# Altium PCB board_layout.PcbDoc
Units mm, origin at the board's own origin, x right, y up, seen from the top; angles counter-clockwise.
Board outline 300 x 220 mm, 4 copper layers (Top Layer, Internal Plane 1, Signal Layer 1, Bottom Layer), stack 1.6 mm thick; 35 components, 1 nets, 750 pads, 0 vias.
Unrouted connection lines stored in the file: 11.
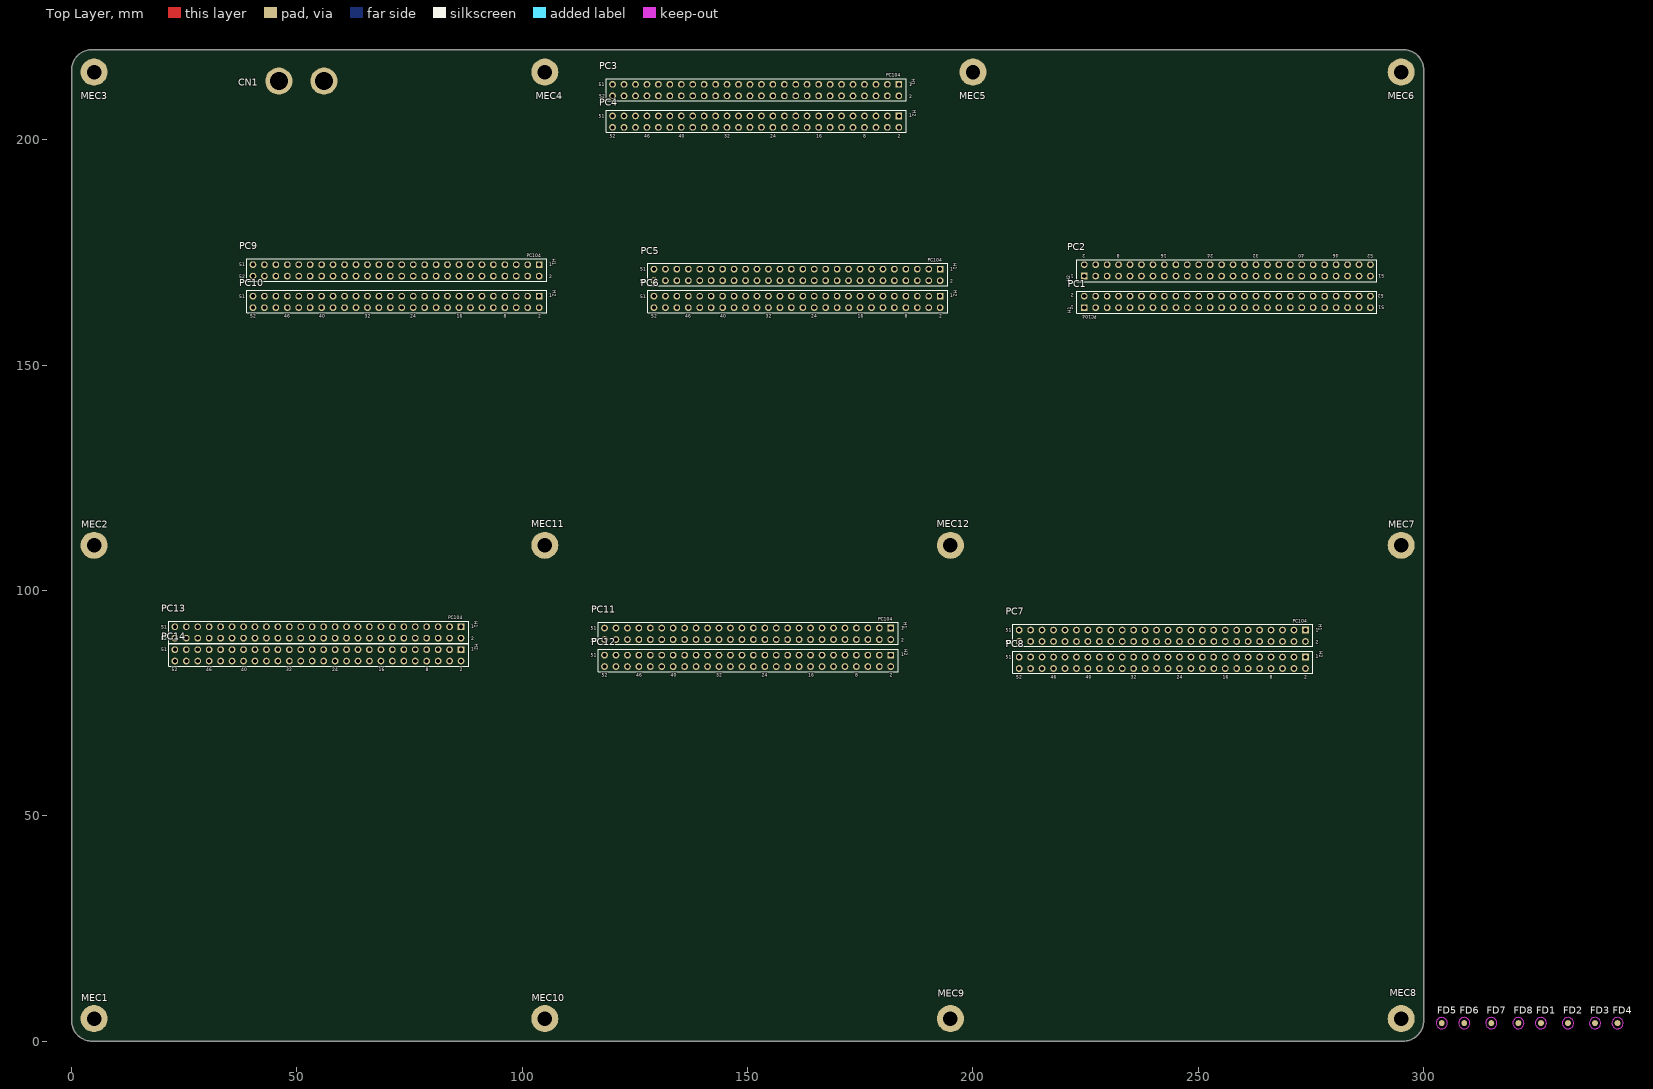
[diagram p0: Top Layer view]
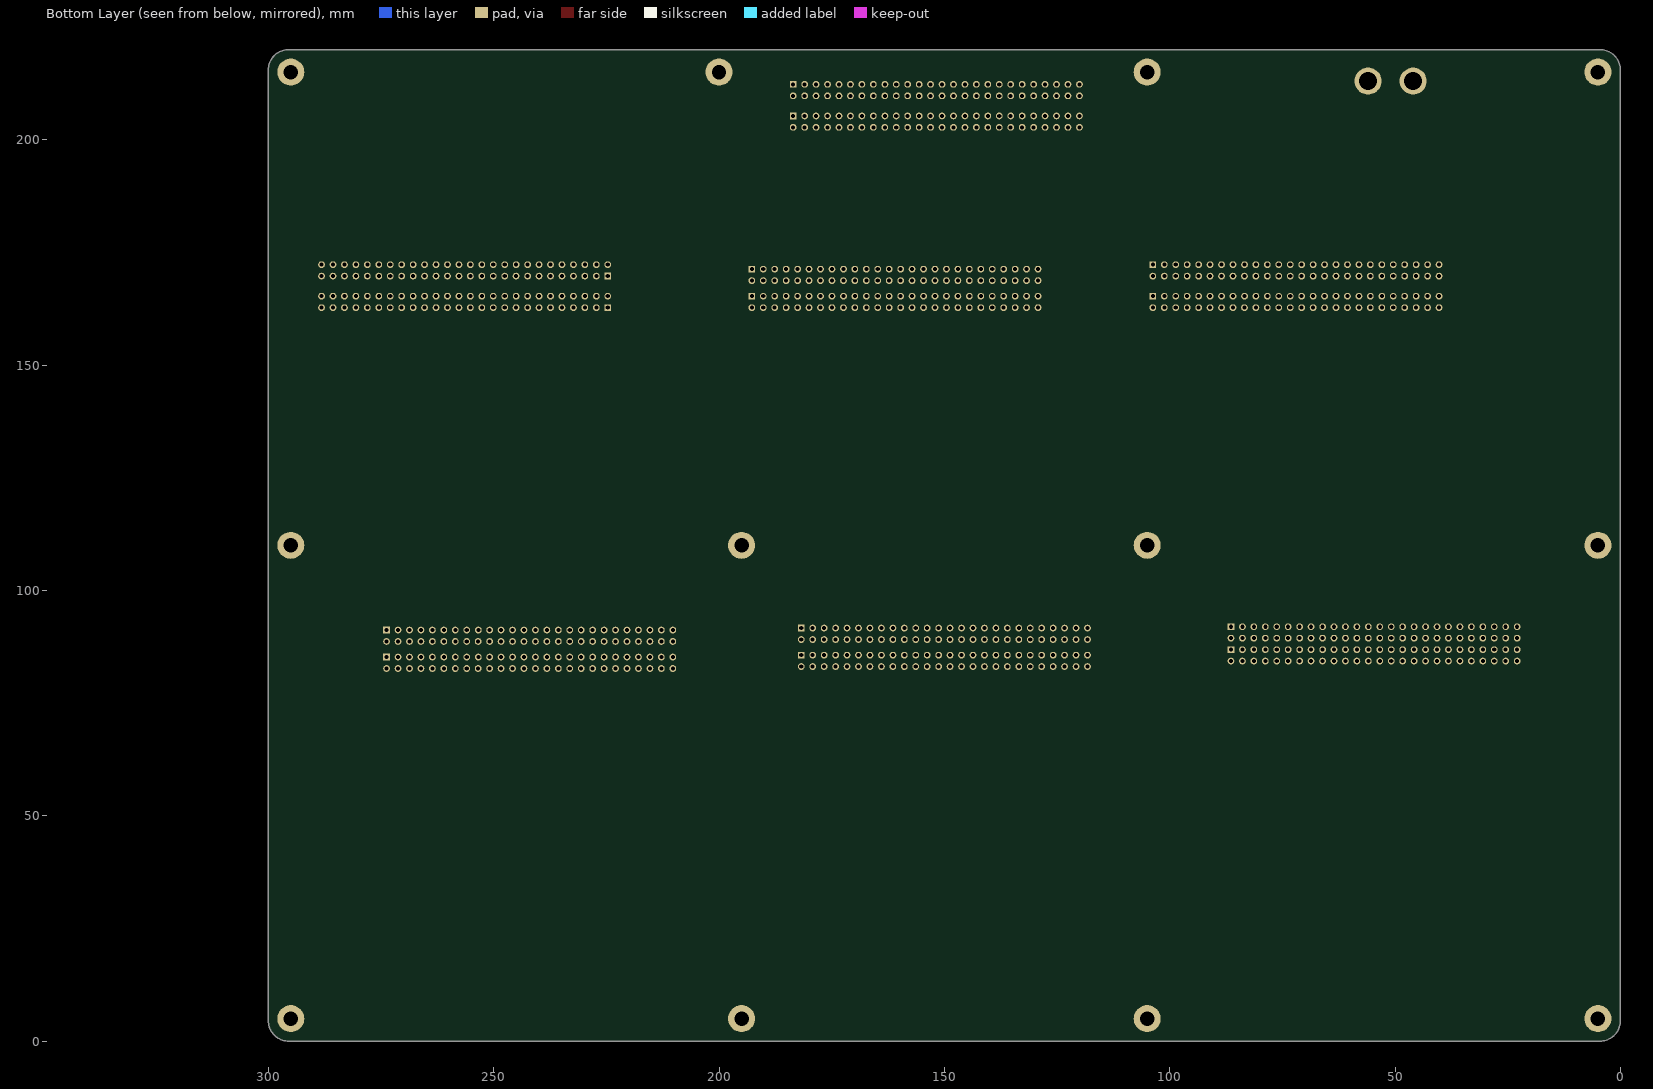
[diagram p1: Bottom Layer view, seen from below]
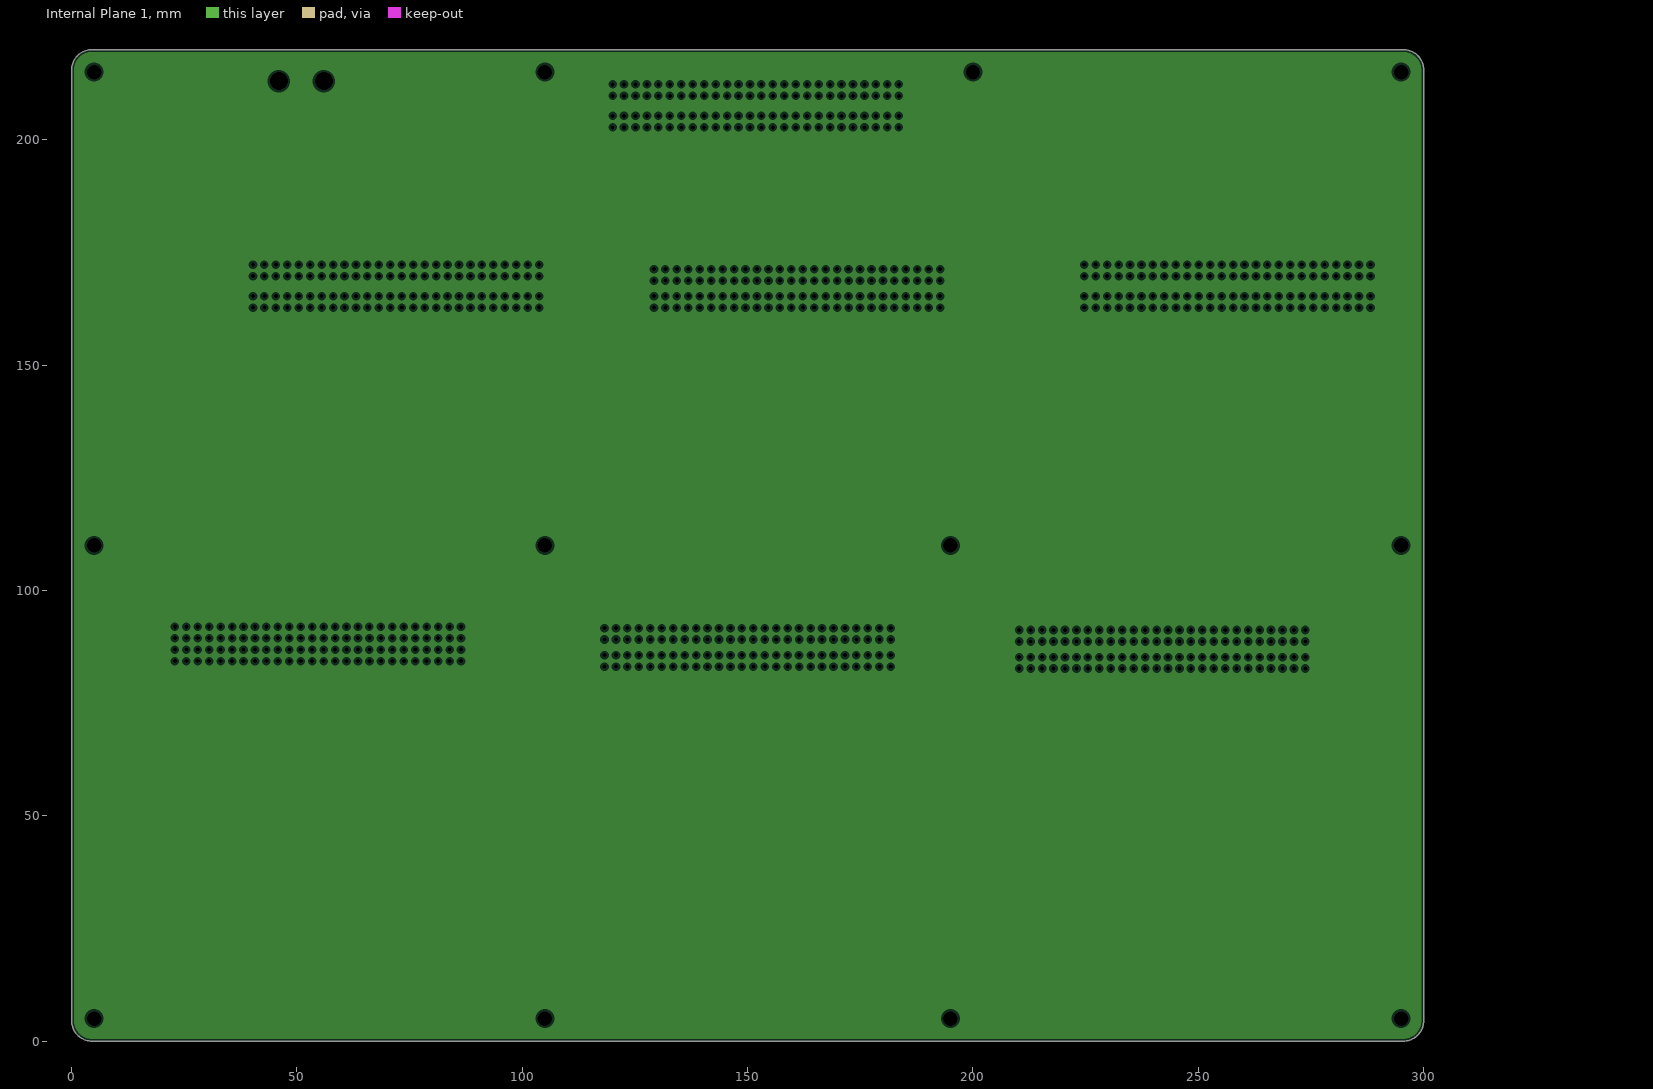
[diagram p2: Internal Plane 1, clearances drawn from the general rule]

## Layer stack, top to bottom
Top Solder: solder mask 0.013, Solder Resist, Dk 3.3
Top Layer: signal copper 0.035
Dielectric 1: prepreg 0.13, FR-4, Dk 4.2
Internal Plane 1: plane copper 0.035
Dielectric 2: core 1.2, FR-4, Dk 4.2
Signal Layer 1: signal copper 0.035
Dielectric 3: prepreg 0.13, FR-4, Dk 4.2
Bottom Layer: signal copper 0.035
Bottom Solder: solder mask 0.013, Solder Resist, Dk 3.3

## Board outline
300,210 300,215.428 ccw(c295.428,215.428) 295.428,220 290,220 10,220 4.572,220 ccw(c4.572,215.428) 0,215.428 0,4.572 ccw(c4.572,4.572) 4.572,0 295.428,0 ccw(c295.428,4.572) 300,4.572 300,10

## Design rules (kind name [scope] priority, off if disabled: settings)
Clearance [All] p1: gap=0.254 ignorepadtopadclearanceinfootprint=FALSE except(0: Arc-Hole Track-Hole SMDPad-Hole THPad-Hole Via-Hole Fill-Hole Poly-Hole Region-Hole Text-Hole)
PlaneClearance [All] p1: clearance=0.508
PlaneConnect [All] p1: planeconnectstyle=Relief reliefexpansion=0.508 reliefentries=4 reliefconductorwidth=0.254 reliefairgap=0.254
PolygonConnect [All] p1: connectstyle=Relief reliefconductorwidth=0.254 reliefentries=4 polygonreliefangle="90 Angle" airgapwidth=0.254
RoutingVias [All] p1: holewidth=0.711 width=1.27 viastyle="Through Hole" minholewidth=0.711 minwidth=1.27 maxholewidth=0.711 maxwidth=1.27
SolderMaskExpansion [All] p1: expansion=0.102
Width [All] p1: maxlimit=0.254 minlimit=0.254 preferedwidth=0.254
28 further rules are at their usual default settings.

## Classes and differential pairs
component class 1_flatsat_interfaces: CN1 PC1 PC2 PC3 PC4 PC5 PC6 PC7 PC8 PC9 PC10 PC11 PC12 PC13 PC14 R1 R2 R3 R4 R5 R6 R7 R8 R9
component class 0_architecture: _PCB1 COP1 FD1 FD2 FD3 FD4 FD5 FD6 FD7 FD8 MASK1 MEC1 MEC2 MEC3 MEC4 MEC5 MEC6 MEC7 MEC8 MEC9 MEC10 MEC11 MEC12 SILK1

## Components (designator, comment, footprint, x,y, rotation, side; value= is the part's Value field where it differs from the comment)
CN1 "dummy_banana" 4mm_hole 56,213 r180 top
FD1 "Fiducial 1.3" "Fiducial 1.3mm" 326,4 r0 top
FD2 "Fiducial 1.3" "Fiducial 1.3mm" 332,4 r0 top
FD3 "Fiducial 1.3" "Fiducial 1.3mm" 338,4 r0 top
FD4 "Fiducial 1.3" "Fiducial 1.3mm" 343,4 r0 top
FD5 "Fiducial 1.3" "Fiducial 1.3mm" 304,4 r0 top
FD6 "Fiducial 1.3" "Fiducial 1.3mm" 309,4 r0 top
FD7 "Fiducial 1.3" "Fiducial 1.3mm" 315,4 r0 top
FD8 "Fiducial 1.3" "Fiducial 1.3mm" 321,4 r0 top
MEC1 "M3" "M3 hole"#1 5,5 r0 top
MEC2 "M3" "M3 hole"#1 5,110 r0 top
MEC3 "M3" "M3 hole"#1 5,215 r0 top
MEC4 "M3" "M3 hole"#2 105,213.62 r0 top
MEC5 "M3" "M3 hole"#3 203.4,215 r0 top
MEC6 "M3" "M3 hole"#4 296.6,215 r0 top
MEC7 "M3" "M3 hole"#1 295,110 r0 top
MEC8 "M3" "M3 hole"#5 295,25 r0 top
MEC9 "M3" "M3 hole"#6 195,6 r0 top
MEC10 "M3" "M3 hole"#1 105,5 r0 top
MEC11 "M3" "M3 hole"#4 106.6,110 r0 top
MEC12 "M3" "M3 hole"#3 198.4,110 r0 top
PC1 "Inner PC104" Inner_SSW-126-01-G-D 256.43,164 r180 top
PC2 "External PC104" external_SSW-126-01-G-D 256.43,171 r180 top
PC3 "Inner PC104" Inner_SSW-126-01-G-D 151.79,211 r0 top
PC4 "External PC104" external_SSW-126-01-G-D 151.79,204 r0 top
PC5 "Inner PC104" Inner_SSW-126-01-G-D 160.97,170 r0 top
PC6 "External PC104" external_SSW-126-01-G-D 160.97,164 r0 top
PC7 "Inner PC104" Inner_SSW-126-01-G-D 242,89.94 r0 top
PC8 "External PC104" external_SSW-126-01-G-D 242,83.94 r0 top
PC9 "Inner PC104" Inner_SSW-126-01-G-D 72,171 r0 top
PC10 "External PC104" external_SSW-126-01-G-D 72,164 r0 top
PC11 "Inner PC104" Inner_SSW-126-01-G-D 150,90.37 r0 top
PC12 "External PC104" external_SSW-126-01-G-D 150,84.37 r0 top
PC13 "Inner PC104" Inner_SSW-126-01-G-D 54.67,90.67 r0 top
PC14 "External PC104" external_SSW-126-01-G-D 54.67,85.59 r0 top

## Footprints (in the part's own frame and the unit in brackets; to place one, negate y for a bottom-side part, rotate by r counter-clockwise, add the part's x,y. Pads: shape width x height; smd on the part's side, far side on the other; paste and mask are expansions set on the pad)
4mm_hole [mm]
  round 6 hole 4: 0(0,0) 1(10,0)
external_SSW-126-01-G-D [mm] "CONN RCPT 52POS 0.1 GOLD PCB"
  rect 1.5x1.5 hole 0.9: H2-1(31.75,1.27)
  round 1.5 hole 0.9: H2-2(31.75,-1.27) H2-3(29.21,1.27) H2-4(29.21,-1.27) H2-5(26.67,1.27) H2-6(26.67,-1.27) H2-7(24.13,1.27) H2-8(24.13,-1.27) H2-9(21.59,1.27) H2-10(21.59,-1.27) H2-11(19.05,1.27) H2-12(19.05,-1.27) H2-13(16.51,1.27) H2-14(16.51,-1.27) H2-15(13.97,1.27) H2-16(13.97,-1.27) H2-17(11.405,1.27) H2-18(11.43,-1.27) H2-19(8.89,1.27) H2-20(8.89,-1.27) H2-21(6.35,1.27) H2-22(6.35,-1.27) H2-23(3.81,1.27) H2-24(3.81,-1.27) H2-25(1.27,1.27) H2-26(1.27,-1.27) H2-27(-1.27,1.27) H2-28(-1.27,-1.27) H2-29(-3.81,1.27) H2-30(-3.81,-1.27) H2-31(-6.35,1.27) H2-32(-6.35,-1.27) H2-33(-8.89,1.27) H2-34(-8.89,-1.27) H2-35(-11.43,1.27) H2-36(-11.43,-1.27) H2-37(-13.97,1.27) H2-38(-13.97,-1.27) H2-39(-16.51,1.27) H2-40(-16.51,-1.27) H2-41(-19.05,1.27) H2-42(-19.05,-1.27) H2-43(-21.59,1.27) H2-44(-21.59,-1.27) H2-45(-24.13,1.27) H2-46(-24.13,-1.27) H2-47(-26.67,1.27) H2-48(-26.67,-1.27) H2-49(-29.21,1.27) H2-50(-29.21,-1.27) H2-51(-31.75,1.27) H2-52(-31.75,-1.27)
  silkscreen extent -33.13,-2.37 33.42,2.54, body extent -33.27,-2.43 33.27,2.52, height 8.52
"Fiducial 1.3mm" [mm]
  round 1.3 smd mask+0.6: FD0(0,0)
  Top Layer keep-out circle w0.1: c0,0 r1.25
Inner_SSW-126-01-G-D [mm] "CONN RCPT 52POS 0.1 GOLD PCB"
  rect 1.5x1.5 hole 0.9: H1-1(31.75,1.27)
  round 1.5 hole 0.9: H1-2(31.75,-1.27) H1-3(29.21,1.27) H1-4(29.21,-1.27) H1-5(26.67,1.27) H1-6(26.67,-1.27) H1-7(24.13,1.27) H1-8(24.13,-1.27) H1-9(21.59,1.27) H1-10(21.59,-1.27) H1-11(19.05,1.27) H1-12(19.05,-1.27) H1-13(16.51,1.27) H1-14(16.51,-1.27) H1-15(13.97,1.27) H1-16(13.97,-1.27) H1-17(11.405,1.27) H1-18(11.43,-1.27) H1-19(8.89,1.27) H1-20(8.89,-1.27) H1-21(6.35,1.27) H1-22(6.35,-1.27) H1-23(3.81,1.27) H1-24(3.81,-1.27) H1-25(1.27,1.27) H1-26(1.27,-1.27) H1-27(-1.27,1.27) H1-28(-1.27,-1.27) H1-29(-3.81,1.27) H1-30(-3.81,-1.27) H1-31(-6.35,1.27) H1-32(-6.35,-1.27) H1-33(-8.89,1.27) H1-34(-8.89,-1.27) H1-35(-11.43,1.27) H1-36(-11.43,-1.27) H1-37(-13.97,1.27) H1-38(-13.97,-1.27) H1-39(-16.51,1.27) H1-40(-16.51,-1.27) H1-41(-19.05,1.27) H1-42(-19.05,-1.27) H1-43(-21.59,1.27) H1-44(-21.59,-1.27) H1-45(-24.13,1.27) H1-46(-24.13,-1.27) H1-47(-26.67,1.27) H1-48(-26.67,-1.27) H1-49(-29.21,1.27) H1-50(-29.21,-1.27) H1-51(-31.75,1.27) H1-52(-31.75,-1.27)
  silkscreen extent -33.13,-2.37 33.42,2.54, body extent -33.27,-2.43 33.27,2.52, height 8.52
"M3 hole"#1 [mm]
  round 6 hole 3.2: 0(0,0)
"M3 hole"#2 [mm]
  round 6 hole 3.2: 0(0,1.38)
"M3 hole"#3 [mm]
  round 6 hole 3.2: 0(-3.4,0)
"M3 hole"#4 [mm]
  round 6 hole 3.2: 0(-1.6,0)
"M3 hole"#5 [mm]
  round 6 hole 3.2: 0(0,-20)
"M3 hole"#6 [mm]
  round 6 hole 3.2: 0(0,-1)

## Part data
FD1 FD2 FD3 FD4 FD5 FD6 FD7 FD8: "Fiducial 1.3mm"
MEC1 MEC2 MEC3 MEC4 MEC5 MEC6 MEC7 MEC8 MEC9 MEC10 MEC11 MEC12: library part "M3 hole", "M3 hole"
PC1 PC3 PC5 PC7 PC9 PC11 PC13: library part Inner_SSW-126-01-G-D, "52 Position Receptacle Connector  Through Hole", Color=Black, Contact Resistance=10mR, Manufacturer=Samtec, Manufacturer Part Number=SSW-126-01-G-D, Max Current Rating=5.5A, Max Operating Temperature=125°C, Max Voltage Rating (AC)=550V, Min Operating Temperature=-55°C, Supplier Part Number 1=200-SSW12601GD, ComponentLink1Description=http://suddendocs.samtec.com/prints/ssw-1xx-xx-xxx-x-xx-xxx-xx-mkt.pdf?src-supplier=Digi-Key, ComponentLink1URL=http://suddendocs.samtec.com/prints/ssw-1xx-xx-xxx-x-xx-xxx-xx-mkt.pdf?src-supplier=Digi-Key, Connector Type=Receptacle,Socket, Contact Material=Bronze, Contact Plating=Gold, Depth=4.95mm, Gender=Receptacle, Housing Color=Black, Housing Material=Polymer, Lead Free="Lead Free", Length=66.55mm, Mating Cycles=100, Mount="Through Hole", Number of Contacts=52, Number of Positions=52, Number of Rows=2, Orientation=Straight, Packaging=Bulk, Partnumber=SSW-126-01-G-D, Pitch=2.54mm, Pricing 1="1=6.95, 10=5.8, 100=4.93, 250=4.4, 500=4.05, 1000=3.8 (USD)", Pricing 2="1=6.69, 10=6.415, 25=5.8576, 50=5.5786, 100=5.2996, 250=4.74176, 500=4.46284 (USD)", REACH SVHC="No SVHC", Row Spacing=0.1inch, Stock 1=86, Stock 2=0, Supplier 1=Mouser, Supplier 2=Digi-Key, Supplier Part Number 2=SAM1208-26-ND, Termination=Solder, Width=4.95mm
PC2 PC4 PC6 PC8 PC10 PC12 PC14: library part External_SSW-126-01-G-D_1, "52 Position Receptacle Connector  Through Hole", Color=Black, Contact Resistance=10mR, Manufacturer=Samtec, Manufacturer Part Number=SSW-126-01-G-D, Max Current Rating=5.5A, Max Operating Temperature=125°C, Max Voltage Rating (AC)=550V, Min Operating Temperature=-55°C, Supplier Part Number 1=200-SSW12601GD, ComponentLink1Description=http://suddendocs.samtec.com/prints/ssw-1xx-xx-xxx-x-xx-xxx-xx-mkt.pdf?src-supplier=Digi-Key, ComponentLink1URL=http://suddendocs.samtec.com/prints/ssw-1xx-xx-xxx-x-xx-xxx-xx-mkt.pdf?src-supplier=Digi-Key, Connector Type=Receptacle,Socket, Contact Material=Bronze, Contact Plating=Gold, Depth=4.95mm, Gender=Receptacle, Housing Color=Black, Housing Material=Polymer, Lead Free="Lead Free", Length=66.55mm, Mating Cycles=100, Mount="Through Hole", Number of Contacts=52, Number of Positions=52, Number of Rows=2, Orientation=Straight, Packaging=Bulk, Partnumber=SSW-126-01-G-D, Pitch=2.54mm, Pricing 1="1=6.95, 10=5.8, 100=4.93, 250=4.4, 500=4.05, 1000=3.8 (USD)", Pricing 2="1=6.69, 10=6.415, 25=5.8576, 50=5.5786, 100=5.2996, 250=4.74176, 500=4.46284 (USD)", REACH SVHC="No SVHC", Row Spacing=0.1inch, Stock 1=86, Stock 2=0, Supplier 1=Mouser, Supplier 2=Digi-Key, Supplier Part Number 2=SAM1208-26-ND, Termination=Solder, Width=4.95mm

## Nets (pads, with @x,y where several pads share a name; then routed paths per layer and width w, separated by ;. In a path a pad name is that pad's centre, name@x,y a point inside that pad or via, vN(x,y) a via of type N, cw(c..) or ccw(c..) an arc to the next point about the centre after c; other vN are vias at no path point)
EARTH: MEC1.0 MEC2.0 MEC3.0 MEC4.0 MEC5.0 MEC6.0 MEC7.0 MEC8.0 MEC9.0 MEC10.0 MEC11.0 MEC12.0
pads on no net: CN1.0 CN1.1 FD1.FD0 FD2.FD0 FD3.FD0 FD4.FD0 FD5.FD0 FD6.FD0 FD7.FD0 FD8.FD0 PC1.H1-1 PC1.H1-2 PC1.H1-3 PC1.H1-4 PC1.H1-5 PC1.H1-6 PC1.H1-7 PC1.H1-8 PC1.H1-9 PC1.H1-10 PC1.H1-11 PC1.H1-12 PC1.H1-13 PC1.H1-14 PC1.H1-15 PC1.H1-16 PC1.H1-17 PC1.H1-18 PC1.H1-19 PC1.H1-20 PC1.H1-21 PC1.H1-22 PC1.H1-23 PC1.H1-24 PC1.H1-25 PC1.H1-26 PC1.H1-27 PC1.H1-28 PC1.H1-29 PC1.H1-30 PC1.H1-31 PC1.H1-32 PC1.H1-33 PC1.H1-34 PC1.H1-35 PC1.H1-36 PC1.H1-37 PC1.H1-38 PC1.H1-39 PC1.H1-40 PC1.H1-41 PC1.H1-42 PC1.H1-43 PC1.H1-44 PC1.H1-45 PC1.H1-46 PC1.H1-47 PC1.H1-48 PC1.H1-49 PC1.H1-50 PC1.H1-51 PC1.H1-52 PC2.H2-1 PC2.H2-2 PC2.H2-3 PC2.H2-4 PC2.H2-5 PC2.H2-6 PC2.H2-7 PC2.H2-8 PC2.H2-9 PC2.H2-10 PC2.H2-11 PC2.H2-12 PC2.H2-13 PC2.H2-14 PC2.H2-15 PC2.H2-16 PC2.H2-17 PC2.H2-18 PC2.H2-19 PC2.H2-20 PC2.H2-21 PC2.H2-22 PC2.H2-23 PC2.H2-24 PC2.H2-25 PC2.H2-26 PC2.H2-27 PC2.H2-28 PC2.H2-29 PC2.H2-30 PC2.H2-31 PC2.H2-32 PC2.H2-33 PC2.H2-34 PC2.H2-35 PC2.H2-36 PC2.H2-37 PC2.H2-38 PC2.H2-39 PC2.H2-40 PC2.H2-41 PC2.H2-42 PC2.H2-43 PC2.H2-44 PC2.H2-45 PC2.H2-46 PC2.H2-47 PC2.H2-48 PC2.H2-49 PC2.H2-50 PC2.H2-51 PC2.H2-52 PC3.H1-1 PC3.H1-2 PC3.H1-3 PC3.H1-4 PC3.H1-5 PC3.H1-6 PC3.H1-7 PC3.H1-8 PC3.H1-9 PC3.H1-10 PC3.H1-11 PC3.H1-12 PC3.H1-13 PC3.H1-14 PC3.H1-15 PC3.H1-16 PC3.H1-17 PC3.H1-18 PC3.H1-19 PC3.H1-20 PC3.H1-21 PC3.H1-22 PC3.H1-23 PC3.H1-24 PC3.H1-25 PC3.H1-26 PC3.H1-27 PC3.H1-28 PC3.H1-29 PC3.H1-30 PC3.H1-31 PC3.H1-32 PC3.H1-33 PC3.H1-34 PC3.H1-35 PC3.H1-36 PC3.H1-37 PC3.H1-38 PC3.H1-39 PC3.H1-40 PC3.H1-41 PC3.H1-42 PC3.H1-43 PC3.H1-44 PC3.H1-45 PC3.H1-46 PC3.H1-47 PC3.H1-48 PC3.H1-49 PC3.H1-50 PC3.H1-51 PC3.H1-52 PC4.H2-1 PC4.H2-2 PC4.H2-3 PC4.H2-4 PC4.H2-5 PC4.H2-6 PC4.H2-7 PC4.H2-8 PC4.H2-9 PC4.H2-10 PC4.H2-11 PC4.H2-12 PC4.H2-13 PC4.H2-14 PC4.H2-15 PC4.H2-16 PC4.H2-17 PC4.H2-18 PC4.H2-19 PC4.H2-20 PC4.H2-21 PC4.H2-22 PC4.H2-23 PC4.H2-24 PC4.H2-25 PC4.H2-26 PC4.H2-27 PC4.H2-28 PC4.H2-29 PC4.H2-30 PC4.H2-31 PC4.H2-32 PC4.H2-33 PC4.H2-34 PC4.H2-35 PC4.H2-36 PC4.H2-37 PC4.H2-38 PC4.H2-39 PC4.H2-40 PC4.H2-41 PC4.H2-42 PC4.H2-43 PC4.H2-44 PC4.H2-45 PC4.H2-46 PC4.H2-47 PC4.H2-48 PC4.H2-49 PC4.H2-50 PC4.H2-51 PC4.H2-52 PC5.H1-1 PC5.H1-2 PC5.H1-3 PC5.H1-4 PC5.H1-5 PC5.H1-6 PC5.H1-7 PC5.H1-8 PC5.H1-9 PC5.H1-10 PC5.H1-11 PC5.H1-12 PC5.H1-13 PC5.H1-14 PC5.H1-15 PC5.H1-16 PC5.H1-17 PC5.H1-18 PC5.H1-19 PC5.H1-20 PC5.H1-21 PC5.H1-22 PC5.H1-23 PC5.H1-24 PC5.H1-25 PC5.H1-26 PC5.H1-27 PC5.H1-28 PC5.H1-29 PC5.H1-30 PC5.H1-31 PC5.H1-32 PC5.H1-33 PC5.H1-34 PC5.H1-35 PC5.H1-36 PC5.H1-37 PC5.H1-38 PC5.H1-39 PC5.H1-40 PC5.H1-41 PC5.H1-42 PC5.H1-43 PC5.H1-44 PC5.H1-45 PC5.H1-46 PC5.H1-47 PC5.H1-48 PC5.H1-49 PC5.H1-50 PC5.H1-51 PC5.H1-52 PC6.H2-1 PC6.H2-2 PC6.H2-3 PC6.H2-4 PC6.H2-5 PC6.H2-6 PC6.H2-7 PC6.H2-8 PC6.H2-9 PC6.H2-10 PC6.H2-11 PC6.H2-12 PC6.H2-13 PC6.H2-14 PC6.H2-15 PC6.H2-16 PC6.H2-17 PC6.H2-18 PC6.H2-19 PC6.H2-20 PC6.H2-21 PC6.H2-22 PC6.H2-23 PC6.H2-24 PC6.H2-25 PC6.H2-26 PC6.H2-27 PC6.H2-28 PC6.H2-29 PC6.H2-30 PC6.H2-31 PC6.H2-32 PC6.H2-33 PC6.H2-34 PC6.H2-35 PC6.H2-36 PC6.H2-37 PC6.H2-38 PC6.H2-39 PC6.H2-40 PC6.H2-41 PC6.H2-42 PC6.H2-43 PC6.H2-44 PC6.H2-45 PC6.H2-46 PC6.H2-47 PC6.H2-48 PC6.H2-49 PC6.H2-50 PC6.H2-51 PC6.H2-52 PC7.H1-1 PC7.H1-2 PC7.H1-3 PC7.H1-4 PC7.H1-5 PC7.H1-6 PC7.H1-7 PC7.H1-8 PC7.H1-9 PC7.H1-10 PC7.H1-11 PC7.H1-12 PC7.H1-13 PC7.H1-14 PC7.H1-15 PC7.H1-16 PC7.H1-17 PC7.H1-18 PC7.H1-19 PC7.H1-20 PC7.H1-21 PC7.H1-22 PC7.H1-23 PC7.H1-24 PC7.H1-25 PC7.H1-26 PC7.H1-27 PC7.H1-28 PC7.H1-29 PC7.H1-30 PC7.H1-31 PC7.H1-32 PC7.H1-33 PC7.H1-34 PC7.H1-35 PC7.H1-36 PC7.H1-37 PC7.H1-38 PC7.H1-39 PC7.H1-40 PC7.H1-41 PC7.H1-42 PC7.H1-43 PC7.H1-44 PC7.H1-45 PC7.H1-46 PC7.H1-47 PC7.H1-48 PC7.H1-49 PC7.H1-50 PC7.H1-51 PC7.H1-52 PC8.H2-1 PC8.H2-2 PC8.H2-3 PC8.H2-4 PC8.H2-5 PC8.H2-6 PC8.H2-7 PC8.H2-8 PC8.H2-9 PC8.H2-10 PC8.H2-11 PC8.H2-12 PC8.H2-13 PC8.H2-14 PC8.H2-15 PC8.H2-16 PC8.H2-17 PC8.H2-18 PC8.H2-19 PC8.H2-20 PC8.H2-21 PC8.H2-22 PC8.H2-23 PC8.H2-24 PC8.H2-25 PC8.H2-26 PC8.H2-27 PC8.H2-28 PC8.H2-29 PC8.H2-30 PC8.H2-31 PC8.H2-32 PC8.H2-33 PC8.H2-34 PC8.H2-35 PC8.H2-36 PC8.H2-37 PC8.H2-38 PC8.H2-39 PC8.H2-40 PC8.H2-41 PC8.H2-42 PC8.H2-43 PC8.H2-44 PC8.H2-45 PC8.H2-46 PC8.H2-47 PC8.H2-48 PC8.H2-49 PC8.H2-50 PC8.H2-51 PC8.H2-52 PC9.H1-1 PC9.H1-2 PC9.H1-3 PC9.H1-4 PC9.H1-5 PC9.H1-6 PC9.H1-7 PC9.H1-8 PC9.H1-9 PC9.H1-10 PC9.H1-11 PC9.H1-12 PC9.H1-13 PC9.H1-14 PC9.H1-15 PC9.H1-16 PC9.H1-17 PC9.H1-18 PC9.H1-19 PC9.H1-20 PC9.H1-21 PC9.H1-22 PC9.H1-23 PC9.H1-24 PC9.H1-25 PC9.H1-26 PC9.H1-27 PC9.H1-28 PC9.H1-29 PC9.H1-30 PC9.H1-31 PC9.H1-32 PC9.H1-33 PC9.H1-34 PC9.H1-35 PC9.H1-36 PC9.H1-37 PC9.H1-38 PC9.H1-39 PC9.H1-40 PC9.H1-41 PC9.H1-42 PC9.H1-43 PC9.H1-44 PC9.H1-45 PC9.H1-46 PC9.H1-47 PC9.H1-48 PC9.H1-49 PC9.H1-50 PC9.H1-51 PC9.H1-52 PC10.H2-1 PC10.H2-2 PC10.H2-3 PC10.H2-4 PC10.H2-5 PC10.H2-6 PC10.H2-7 PC10.H2-8 PC10.H2-9 PC10.H2-10 PC10.H2-11 PC10.H2-12 PC10.H2-13 PC10.H2-14 PC10.H2-15 PC10.H2-16 PC10.H2-17 PC10.H2-18 PC10.H2-19 PC10.H2-20 PC10.H2-21 PC10.H2-22 PC10.H2-23 PC10.H2-24 PC10.H2-25 PC10.H2-26 PC10.H2-27 PC10.H2-28 PC10.H2-29 PC10.H2-30 PC10.H2-31 PC10.H2-32 PC10.H2-33 PC10.H2-34 PC10.H2-35 PC10.H2-36 PC10.H2-37 PC10.H2-38 PC10.H2-39 PC10.H2-40 PC10.H2-41 PC10.H2-42 PC10.H2-43 PC10.H2-44 PC10.H2-45 PC10.H2-46 PC10.H2-47 PC10.H2-48 PC10.H2-49 PC10.H2-50 PC10.H2-51 PC10.H2-52 PC11.H1-1 PC11.H1-2 PC11.H1-3 PC11.H1-4 PC11.H1-5 PC11.H1-6 PC11.H1-7 PC11.H1-8 PC11.H1-9 PC11.H1-10 PC11.H1-11 PC11.H1-12 PC11.H1-13 PC11.H1-14 PC11.H1-15 PC11.H1-16 PC11.H1-17 PC11.H1-18 PC11.H1-19 PC11.H1-20 PC11.H1-21 PC11.H1-22 PC11.H1-23 PC11.H1-24 PC11.H1-25 PC11.H1-26 PC11.H1-27 PC11.H1-28 PC11.H1-29 PC11.H1-30 PC11.H1-31 PC11.H1-32 PC11.H1-33 PC11.H1-34 PC11.H1-35 PC11.H1-36 PC11.H1-37 PC11.H1-38 PC11.H1-39 PC11.H1-40 PC11.H1-41 PC11.H1-42 PC11.H1-43 PC11.H1-44 PC11.H1-45 PC11.H1-46 PC11.H1-47 PC11.H1-48 PC11.H1-49 PC11.H1-50 PC11.H1-51 PC11.H1-52 PC12.H2-1 PC12.H2-2 PC12.H2-3 PC12.H2-4 PC12.H2-5 PC12.H2-6 PC12.H2-7 PC12.H2-8 PC12.H2-9 PC12.H2-10 PC12.H2-11 PC12.H2-12 PC12.H2-13 PC12.H2-14 PC12.H2-15 PC12.H2-16 PC12.H2-17 PC12.H2-18 PC12.H2-19 PC12.H2-20 PC12.H2-21 PC12.H2-22 PC12.H2-23 PC12.H2-24 PC12.H2-25 PC12.H2-26 PC12.H2-27 PC12.H2-28 PC12.H2-29 PC12.H2-30 PC12.H2-31 PC12.H2-32 PC12.H2-33 PC12.H2-34 PC12.H2-35 PC12.H2-36 PC12.H2-37 PC12.H2-38 PC12.H2-39 PC12.H2-40 PC12.H2-41 PC12.H2-42 PC12.H2-43 PC12.H2-44 PC12.H2-45 PC12.H2-46 PC12.H2-47 PC12.H2-48 PC12.H2-49 PC12.H2-50 PC12.H2-51 PC12.H2-52 PC13.H1-1 PC13.H1-2 PC13.H1-3 PC13.H1-4 PC13.H1-5 PC13.H1-6 PC13.H1-7 PC13.H1-8 PC13.H1-9 PC13.H1-10 PC13.H1-11 PC13.H1-12 PC13.H1-13 PC13.H1-14 PC13.H1-15 PC13.H1-16 PC13.H1-17 PC13.H1-18 PC13.H1-19 PC13.H1-20 PC13.H1-21 PC13.H1-22 PC13.H1-23 PC13.H1-24 PC13.H1-25 PC13.H1-26 PC13.H1-27 PC13.H1-28 PC13.H1-29 PC13.H1-30 PC13.H1-31 PC13.H1-32 PC13.H1-33 PC13.H1-34 PC13.H1-35 PC13.H1-36 PC13.H1-37 PC13.H1-38 PC13.H1-39 PC13.H1-40 PC13.H1-41 PC13.H1-42 PC13.H1-43 PC13.H1-44 PC13.H1-45 PC13.H1-46 PC13.H1-47 PC13.H1-48 PC13.H1-49 PC13.H1-50 PC13.H1-51 PC13.H1-52 PC14.H2-1 PC14.H2-2 PC14.H2-3 PC14.H2-4 PC14.H2-5 PC14.H2-6 PC14.H2-7 PC14.H2-8 PC14.H2-9 PC14.H2-10 PC14.H2-11 PC14.H2-12 PC14.H2-13 PC14.H2-14 PC14.H2-15 PC14.H2-16 PC14.H2-17 PC14.H2-18 PC14.H2-19 PC14.H2-20 PC14.H2-21 PC14.H2-22 PC14.H2-23 PC14.H2-24 PC14.H2-25 PC14.H2-26 PC14.H2-27 PC14.H2-28 PC14.H2-29 PC14.H2-30 PC14.H2-31 PC14.H2-32 PC14.H2-33 PC14.H2-34 PC14.H2-35 PC14.H2-36 PC14.H2-37 PC14.H2-38 PC14.H2-39 PC14.H2-40 PC14.H2-41 PC14.H2-42 PC14.H2-43 PC14.H2-44 PC14.H2-45 PC14.H2-46 PC14.H2-47 PC14.H2-48 PC14.H2-49 PC14.H2-50 PC14.H2-51 PC14.H2-52

## Polygon pours and split planes (outlines as drawn)
no net on Internal Plane 1 (split plane): 295.694,219.491 295.959,219.465 296.222,219.421 296.482,219.361 296.737,219.284 296.986,219.19 297.229,219.08 297.464,218.954 297.69,218.813 297.907,218.658 298.113,218.489 298.307,218.307 298.489,218.113 298.658,217.907 298.813,217.69 298.954,217.464 299.08,217.229 299.19,216.986 299.284,216.737 299.361,216.482 299.421,216.222 299.465,215.959 299.491,215.694 299.499,215.444 299.498,215.428 299.498,210 299.498,10 299.498,4.572 299.499,4.556 299.491,4.306 299.465,4.041 299.421,3.778 299.361,3.518 299.284,3.263 299.19,3.014 299.08,2.771 298.954,2.536 298.813,2.31 298.658,2.093 298.489,1.887 298.307,1.693 298.113,1.511 297.907,1.342 297.69,1.187 297.464,1.046 297.229,0.92 296.986,0.81 296.737,0.716 296.482,0.639 296.222,0.579 295.959,0.535 295.694,0.509 295.444,0.501 295.428,0.502 4.572,0.502 4.556,0.501 4.306,0.509 4.041,0.535 3.778,0.579 3.518,0.639 3.263,0.716 3.014,0.81 2.771,0.92 2.536,1.046 2.31,1.187 2.093,1.342 1.887,1.511 1.693,1.693 1.511,1.887 1.342,2.093 1.187,2.31 1.046,2.536 0.92,2.771 0.81,3.014 0.716,3.263 0.639,3.518 0.579,3.778 0.535,4.041 0.509,4.306 0.501,4.556 0.502,4.572 0.502,215.428 0.501,215.444 0.509,215.694 0.535,215.959 0.579,216.222 0.639,216.482 0.716,216.737 0.81,216.986 0.92,217.229 1.046,217.464 1.187,217.69 1.342,217.907 1.511,218.113 1.693,218.307 1.887,218.489 2.093,218.658 2.31,218.813 2.536,218.954 2.771,219.08 3.014,219.19 3.263,219.284 3.518,219.361 3.778,219.421 4.041,219.465 4.306,219.491 4.556,219.499 4.572,219.498 10,219.498 290,219.498 295.428,219.498 295.444,219.499

## Silkscreen, mask and mechanical layers (free items; w line width, h text height)
Mechanical 1:
  lines w0.254: 0,5 ccw(c5,5) 5,0 295,0 ccw(c295,5) 300,5 300,215 ccw(c295,215) 295,220 5,220 ccw(c5,215) 0,215 0,5

## Text inside footprints (layer, text, board x,y; h text height)
PC1: Top Overlay "PC104" at 227.474,161.079 h0.75 r180; Top Overlay "51" at 291.205,163.13 h0.75 r180; Top Overlay "2" at 222.394,165.778 h0.75 r180; Top Overlay "1" at 222.394,163.111 h0.75 r180; Top Overlay "52" at 291.176,165.744 h0.75 r180; Top Overlay "H1" at 221.759,161.46 h0.75 r90
PC2: Top Overlay "H2" at 221.632,168.46 h0.75 r90; Top Overlay "51" at 291.205,170.13 h0.75 r180; Top Overlay "1" at 222.394,169.984 h0.75 r180; Top Overlay "52" at 288.815,174.556 h0.75 r180; Top Overlay "2" at 224.934,174.556 h0.75 r180; Top Overlay "8" at 232.554,174.556 h0.75 r180; Top Overlay "16" at 242.968,174.556 h0.75 r180; Top Overlay "24" at 253.255,174.556 h0.75 r180; Top Overlay "32" at 263.415,174.556 h0.75 r180; Top Overlay "40" at 273.448,174.556 h0.75 r180; Top Overlay "46" at 281.195,174.556 h0.75 r180
PC3: Top Overlay "PC104" at 180.746,213.921 h0.75; Top Overlay "51" at 117.015,211.87 h0.75; Top Overlay "2" at 185.826,209.222 h0.75; Top Overlay "1" at 185.826,211.889 h0.75; Top Overlay "52" at 117.044,209.256 h0.75; Top Overlay "H1" at 186.461,213.54 h0.75 r270
PC4: Top Overlay "H2" at 186.588,206.54 h0.75 r270; Top Overlay "51" at 117.015,204.87 h0.75; Top Overlay "1" at 185.826,205.016 h0.75; Top Overlay "52" at 119.405,200.444 h0.75; Top Overlay "2" at 183.286,200.444 h0.75; Top Overlay "8" at 175.666,200.444 h0.75; Top Overlay "16" at 165.252,200.444 h0.75; Top Overlay "24" at 154.965,200.444 h0.75; Top Overlay "32" at 144.805,200.444 h0.75; Top Overlay "40" at 134.772,200.444 h0.75; Top Overlay "46" at 127.025,200.444 h0.75
PC5: Top Overlay "PC104" at 189.926,172.921 h0.75; Top Overlay "51" at 126.195,170.87 h0.75; Top Overlay "2" at 195.006,168.222 h0.75; Top Overlay "1" at 195.006,170.889 h0.75; Top Overlay "52" at 126.224,168.256 h0.75; Top Overlay "H1" at 195.641,172.54 h0.75 r270
PC6: Top Overlay "H2" at 195.768,166.54 h0.75 r270; Top Overlay "51" at 126.195,164.87 h0.75; Top Overlay "1" at 195.006,165.016 h0.75; Top Overlay "52" at 128.585,160.444 h0.75; Top Overlay "2" at 192.466,160.444 h0.75; Top Overlay "8" at 184.846,160.444 h0.75; Top Overlay "16" at 174.432,160.444 h0.75; Top Overlay "24" at 164.145,160.444 h0.75; Top Overlay "32" at 153.985,160.444 h0.75; Top Overlay "40" at 143.952,160.444 h0.75; Top Overlay "46" at 136.205,160.444 h0.75
PC7: Top Overlay "PC104" at 270.956,92.861 h0.75; Top Overlay "51" at 207.225,90.81 h0.75; Top Overlay "2" at 276.036,88.162 h0.75; Top Overlay "1" at 276.036,90.829 h0.75; Top Overlay "52" at 207.254,88.196 h0.75; Top Overlay "H1" at 276.671,92.48 h0.75 r270
PC8: Top Overlay "H2" at 276.798,86.48 h0.75 r270; Top Overlay "51" at 207.225,84.81 h0.75; Top Overlay "1" at 276.036,84.956 h0.75; Top Overlay "52" at 209.615,80.384 h0.75; Top Overlay "2" at 273.496,80.384 h0.75; Top Overlay "8" at 265.876,80.384 h0.75; Top Overlay "16" at 255.462,80.384 h0.75; Top Overlay "24" at 245.175,80.384 h0.75; Top Overlay "32" at 235.015,80.384 h0.75; Top Overlay "40" at 224.982,80.384 h0.75; Top Overlay "46" at 217.235,80.384 h0.75
PC9: Top Overlay "PC104" at 100.956,173.921 h0.75; Top Overlay "51" at 37.225,171.87 h0.75; Top Overlay "2" at 106.036,169.222 h0.75; Top Overlay "1" at 106.036,171.889 h0.75; Top Overlay "52" at 37.254,169.256 h0.75; Top Overlay "H1" at 106.671,173.54 h0.75 r270
PC10: Top Overlay "H2" at 106.798,166.54 h0.75 r270; Top Overlay "51" at 37.225,164.87 h0.75; Top Overlay "1" at 106.036,165.016 h0.75; Top Overlay "52" at 39.615,160.444 h0.75; Top Overlay "2" at 103.496,160.444 h0.75; Top Overlay "8" at 95.876,160.444 h0.75; Top Overlay "16" at 85.462,160.444 h0.75; Top Overlay "24" at 75.175,160.444 h0.75; Top Overlay "32" at 65.015,160.444 h0.75; Top Overlay "40" at 54.982,160.444 h0.75; Top Overlay "46" at 47.235,160.444 h0.75
PC11: Top Overlay "PC104" at 178.956,93.291 h0.75; Top Overlay "51" at 115.225,91.24 h0.75; Top Overlay "2" at 184.036,88.592 h0.75; Top Overlay "1" at 184.036,91.259 h0.75; Top Overlay "52" at 115.254,88.626 h0.75; Top Overlay "H1" at 184.671,92.91 h0.75 r270
PC12: Top Overlay "H2" at 184.798,86.91 h0.75 r270; Top Overlay "51" at 115.225,85.24 h0.75; Top Overlay "1" at 184.036,85.386 h0.75; Top Overlay "52" at 117.615,80.814 h0.75; Top Overlay "2" at 181.496,80.814 h0.75; Top Overlay "8" at 173.876,80.814 h0.75; Top Overlay "16" at 163.462,80.814 h0.75; Top Overlay "24" at 153.175,80.814 h0.75; Top Overlay "32" at 143.015,80.814 h0.75; Top Overlay "40" at 132.982,80.814 h0.75; Top Overlay "46" at 125.235,80.814 h0.75
PC13: Top Overlay "PC104" at 83.626,93.591 h0.75; Top Overlay "51" at 19.895,91.54 h0.75; Top Overlay "2" at 88.706,88.892 h0.75; Top Overlay "1" at 88.706,91.559 h0.75; Top Overlay "52" at 19.924,88.926 h0.75; Top Overlay "H1" at 89.341,93.21 h0.75 r270
PC14: Top Overlay "H2" at 89.468,88.13 h0.75 r270; Top Overlay "51" at 19.895,86.46 h0.75; Top Overlay "1" at 88.706,86.606 h0.75; Top Overlay "52" at 22.285,82.034 h0.75; Top Overlay "2" at 86.166,82.034 h0.75; Top Overlay "8" at 78.546,82.034 h0.75; Top Overlay "16" at 68.132,82.034 h0.75; Top Overlay "24" at 57.845,82.034 h0.75; Top Overlay "32" at 47.685,82.034 h0.75; Top Overlay "40" at 37.652,82.034 h0.75; Top Overlay "46" at 29.905,82.034 h0.75